# Altium PCB transfer.PcbDoc
Units mil, origin at the board's own origin, x right, y up, seen from the top; angles counter-clockwise.
Board outline 511.81 x 354.33 mil, 2 copper layers (Top Layer, Bottom Layer); 1 components, 0 nets, 10 pads, 0 vias.
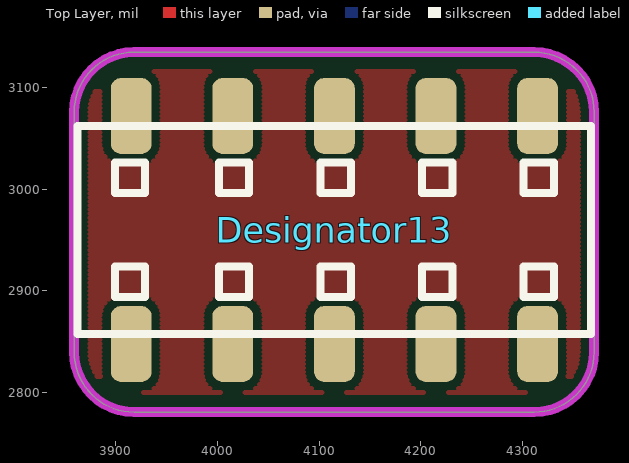
[diagram p0: Top Layer view]
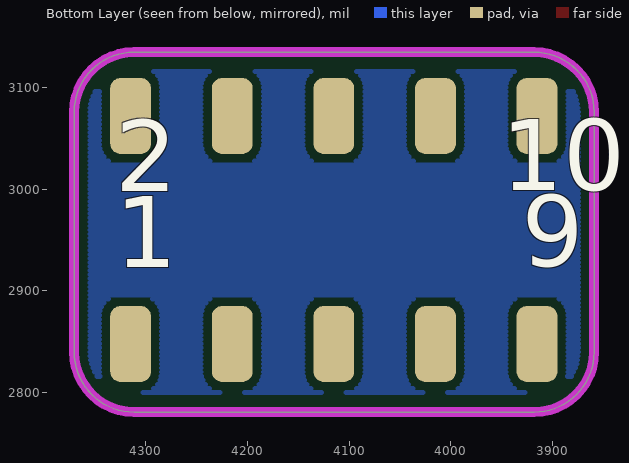
[diagram p1: Bottom Layer view, seen from below]

## Layer stack, top to bottom
Top Solder: solder mask 0.4, Solder Resist, Dk 3.5
Top Layer: signal copper 1.4
Dielectric 1: dielectric 12.6, FR-4, Dk 4.8
Bottom Layer: signal copper 1.4
Bottom Solder: solder mask 0.4, Solder Resist, Dk 3.5

## Board outline
3858.82,2839.72 3858.82,3075.94 cw(c3917.87,3075.94) 3917.87,3135 4311.57,3135 cw(c4311.57,3075.94) 4370.63,3075.94 4370.63,2839.72 cw(c4311.57,2839.72) 4311.57,2780.67 3917.87,2780.67 cw(c3917.87,2839.72)

## Design rules (kind name [scope] priority, off if disabled: settings)
Clearance [All] p1: gap=8 ignorepadtopadclearanceinfootprint=TRUE
PlaneConnect [All] p1: planeconnectstyle=Direct reliefexpansion=20 reliefentries=4 reliefconductorwidth=10 reliefairgap=10
PolygonConnect [All] p1: connectstyle=Direct reliefconductorwidth=30 reliefentries=4 polygonreliefangle="90 Angle" airgapwidth=10
RoutingVias [All] p1: holewidth=12 width=24 viastyle="Through Hole" minholewidth=12 minwidth=24 maxholewidth=12 maxwidth=24
SolderMaskExpansion [All] p1: expansion=4 istentingtop=FALSE
Width [All] p1 off: maxlimit=10 minlimit=10 preferedwidth=10
29 further rules are at their usual default settings.

## Components (designator, comment, footprint, x,y, rotation, side; value= is the part's Value field where it differs from the comment)
Designator13 "Comment" HDR2.54-LS-2x5P 4115,2960 r0 top

## Footprints (in the part's own frame and the unit in brackets; to place one, negate y for a bottom-side part, rotate by r counter-clockwise, add the part's x,y. Pads: shape width x height; smd on the part's side, far side on the other; paste and mask are expansions set on the pad)
HDR2.54-LS-2x5P [mm] "脚距：2.54mm，贴片双排母"
  rrect50% 1.02x1.9 all layers, no hole: 1(-5.08,-2.85) 2(-5.08,2.85) 3(-2.54,-2.85) 4(-2.54,2.85) 5(0,-2.85) 6(0,2.85) 7(2.54,-2.85) 8(2.54,2.85) 9(5.08,-2.85) 10(5.08,2.85)
  silkscreen extent -6.42,-2.6 6.41,2.6, body extent -6.38,-3.2 6.38,3.2, height 5.15

## Nets (pads, with @x,y where several pads share a name; then routed paths per layer and width w, separated by ;. In a path a pad name is that pad's centre, name@x,y a point inside that pad or via, vN(x,y) a via of type N, cw(c..) or ccw(c..) an arc to the next point about the centre after c; other vN are vias at no path point)
pads on no net: Designator13.1 Designator13.2 Designator13.3 Designator13.4 Designator13.5 Designator13.6 Designator13.7 Designator13.8 Designator13.9 Designator13.10

## Polygon pours and split planes (outlines as drawn)
no net on Top Layer "NONET_L01_P-001" (hatched Horizontal grid 4 track 5, remove dead copper, pour order 1): 3858.82,2839.72 3858.82,3075.94 cw(c3917.87,3075.94) 3917.87,3135 4311.57,3135 cw(c4311.57,3075.94) 4370.63,3075.94 4370.63,2839.72 cw(c4311.57,2839.72) 4311.57,2780.67 3917.87,2780.67 cw(c3917.87,2839.72)
no net on Bottom Layer "NONET_L01_P-001" (hatched Horizontal grid 4 track 5, remove dead copper, pour order 0): 3858.82,2839.72 3858.82,3075.94 cw(c3917.87,3075.94) 3917.87,3135 4311.57,3135 cw(c4311.57,3075.94) 4370.63,3075.94 4370.63,2839.72 cw(c4311.57,2839.72) 4311.57,2780.67 3917.87,2780.67 cw(c3917.87,2839.72)

## Keep-outs
Keep-Out Layer:
  the board outline again, w10

## Silkscreen, mask and mechanical layers (free items; w line width, h text height)
Bottom Overlay:
  text "10" at 3950,2975.89 h120
  text "2" at 4330,2975 h120
  text "9" at 3930,2900.89 h120
  text "1" at 4330,2900 h120
Mechanical 1:
  the board outline again, w10